# Altium PCB MiniRobot.PcbDoc
Units mm, origin at the board's own origin, x right, y up, seen from the top; angles counter-clockwise.
Board outline 90 x 85 mm, 2 copper layers (Top Layer, Bottom Layer); 52 components, 47 nets, 193 pads, 31 vias.
Unrouted connection lines stored in the file: 31.
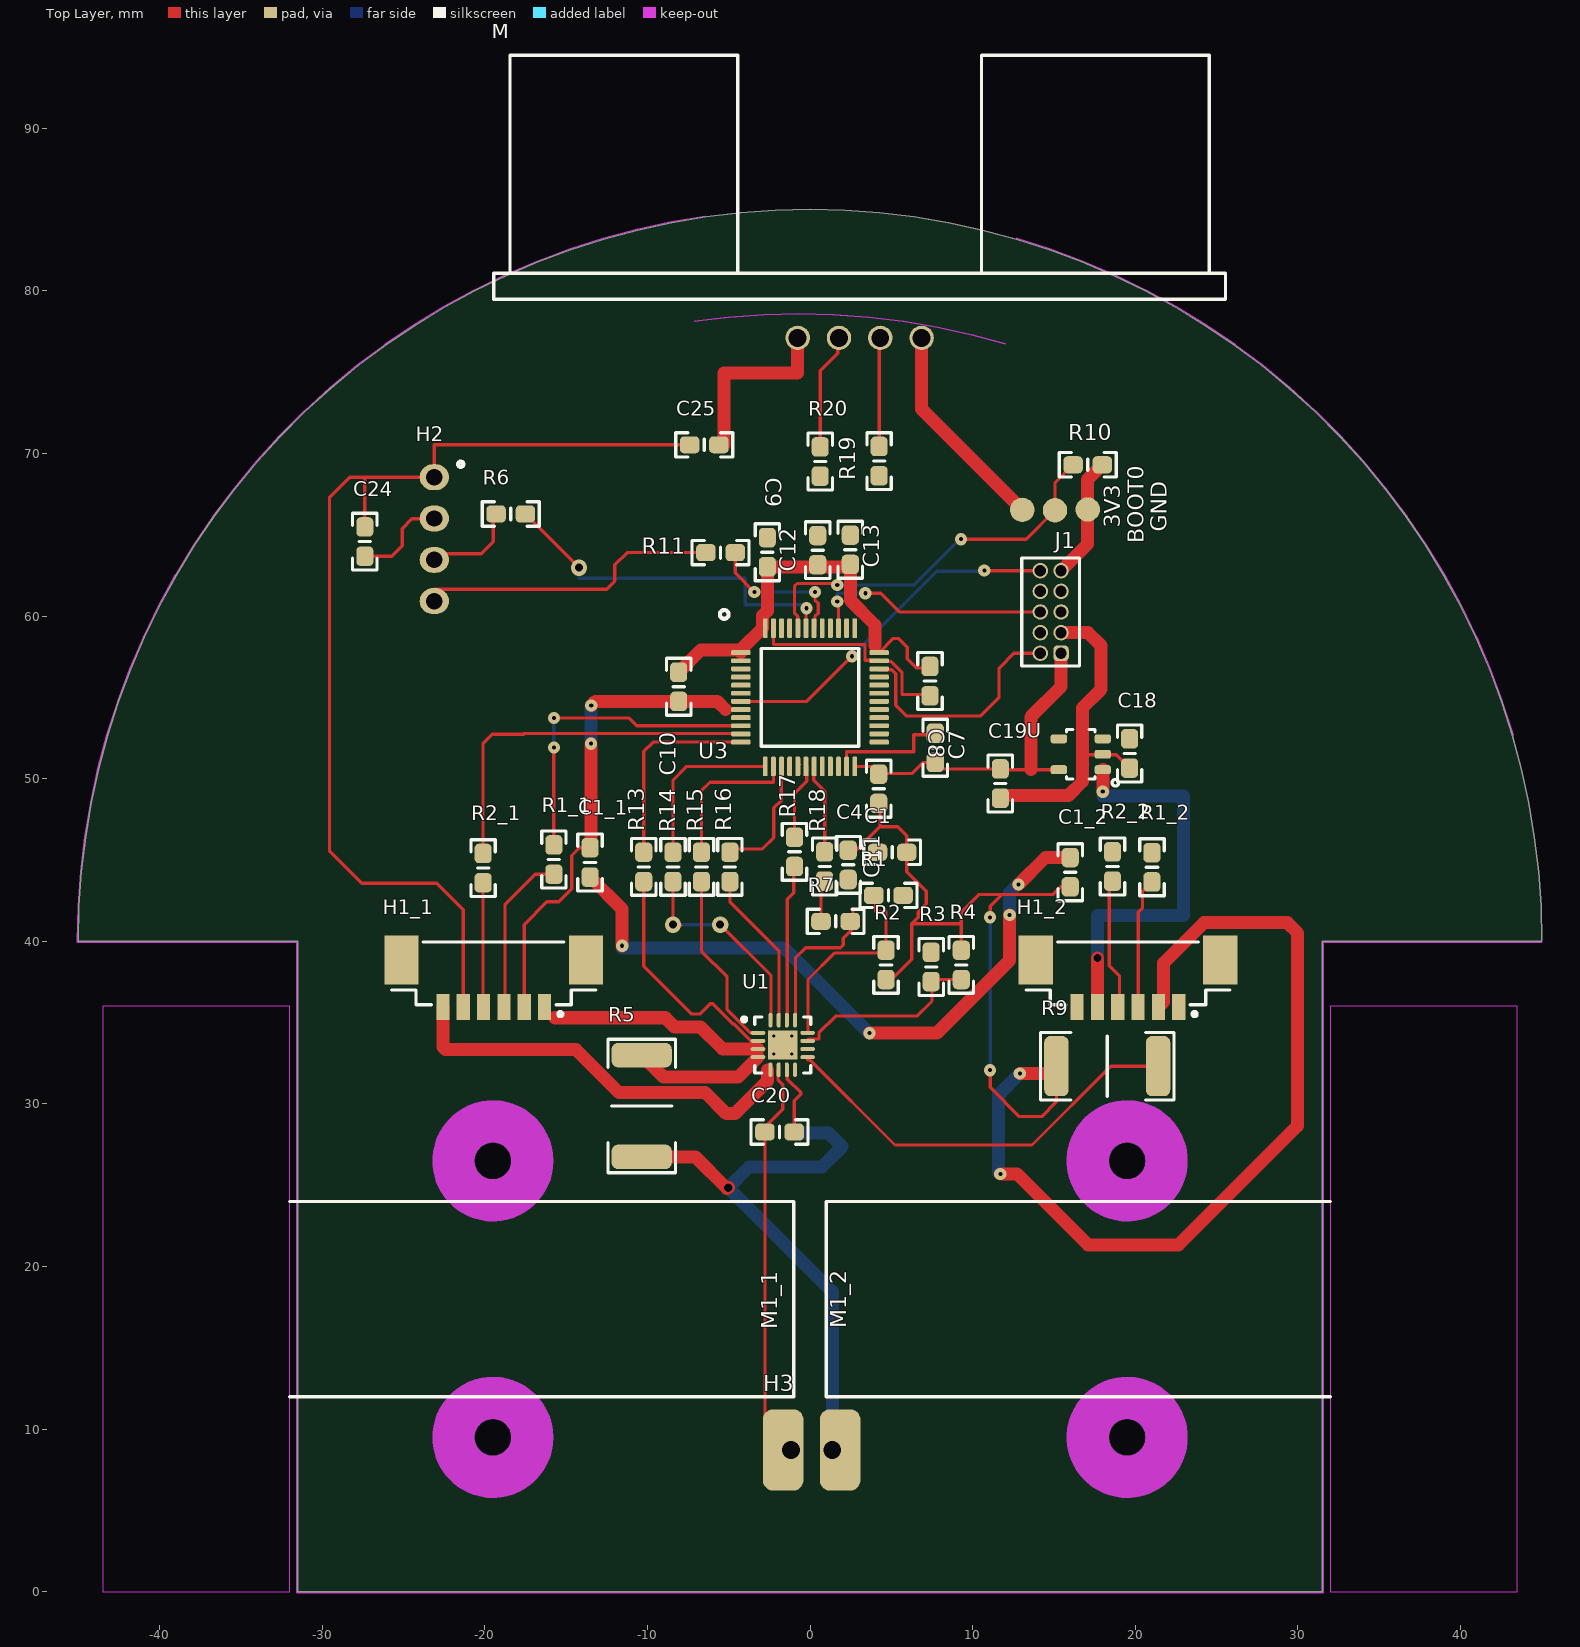
[diagram p0: Top Layer view]
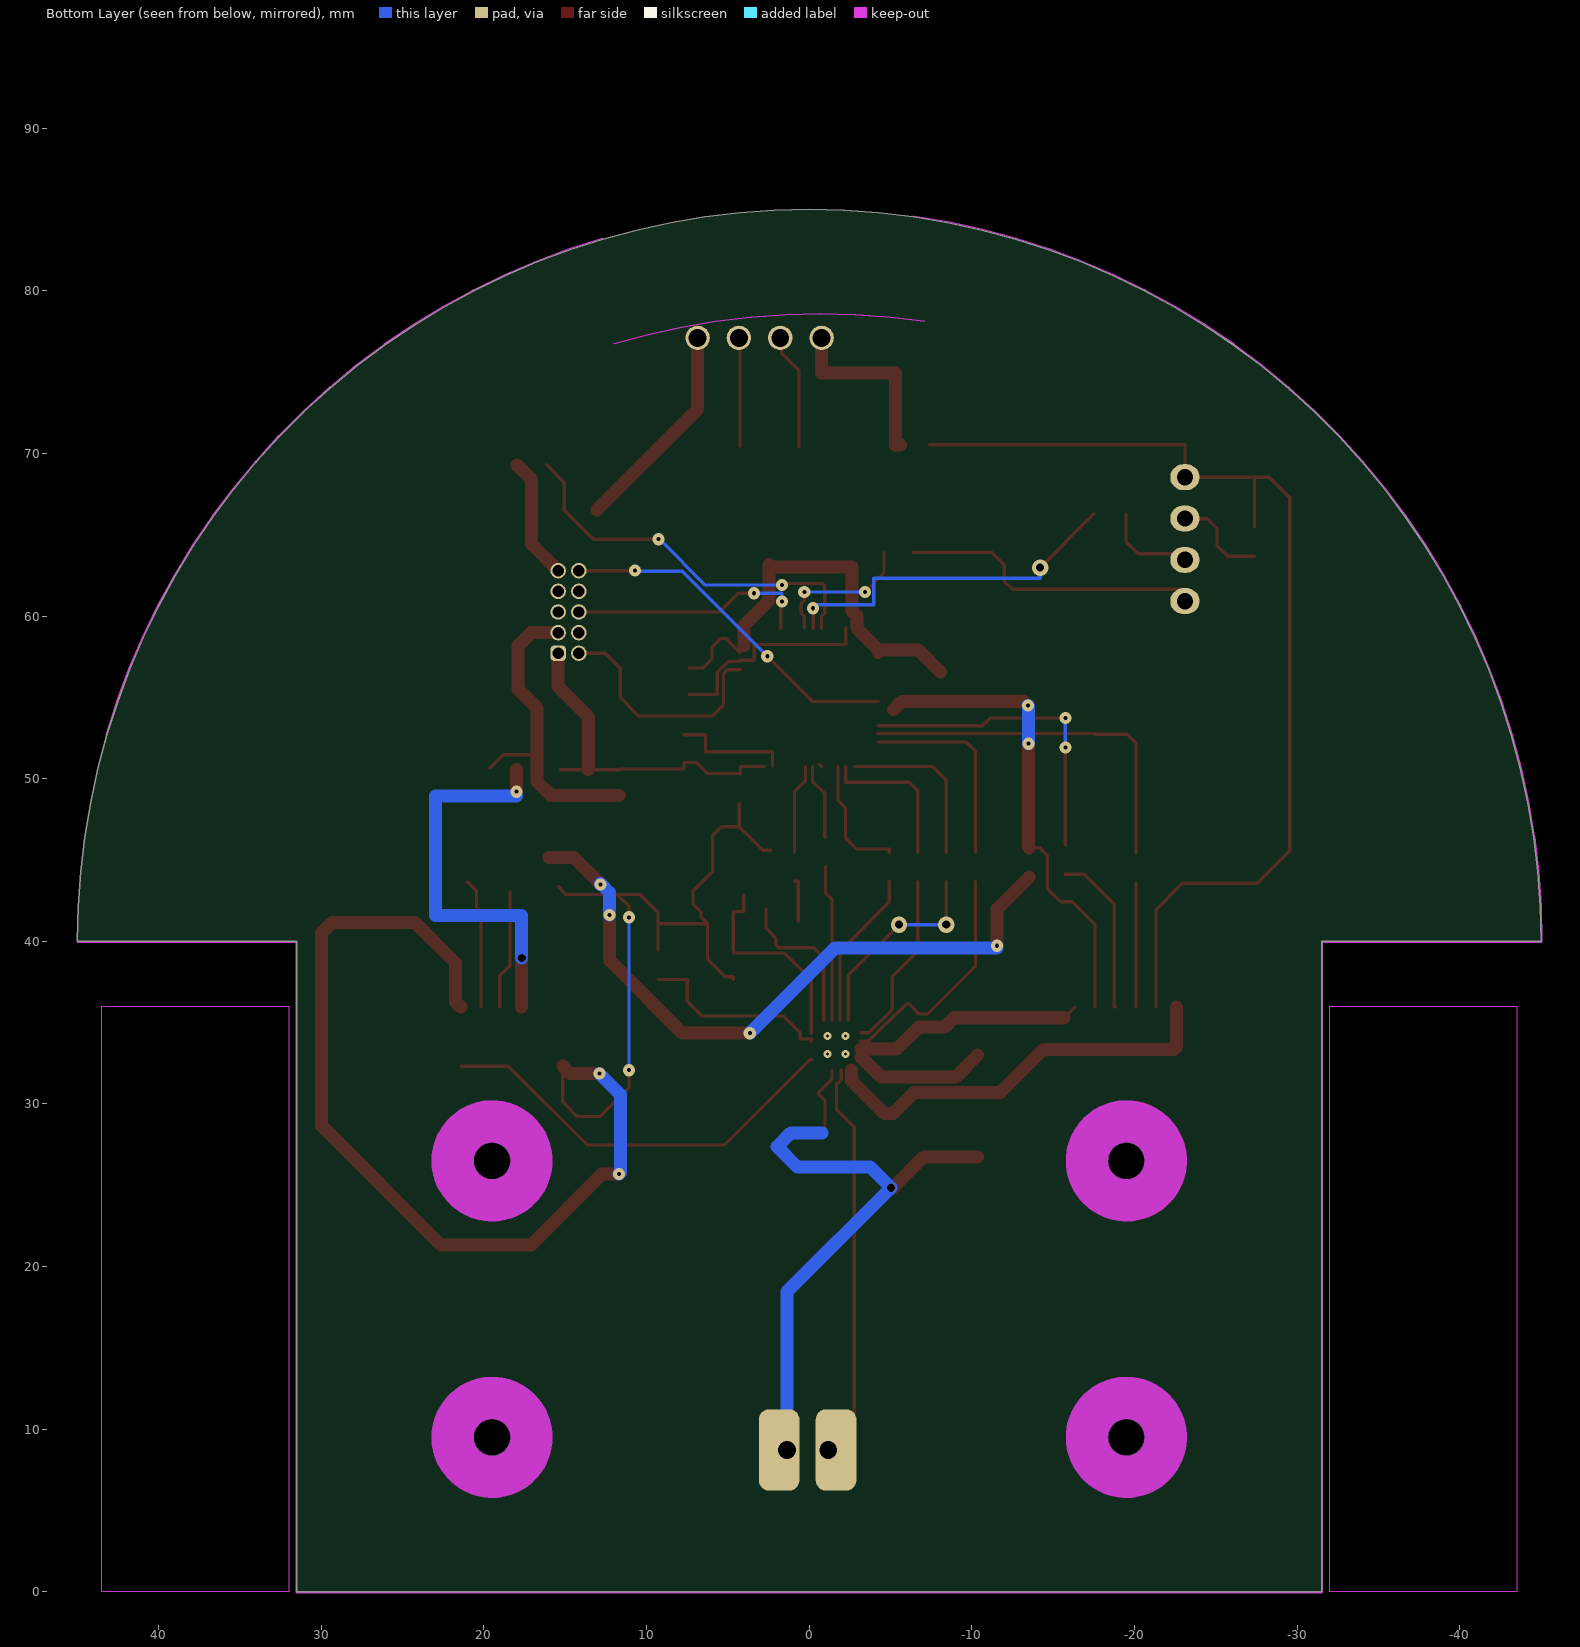
[diagram p1: Bottom Layer view, seen from below]

## Layer stack, top to bottom
Top Solder: solder mask 0.0102, Solder Resist, Dk 3.5
Top Layer: signal copper 0.0356
Dielectric 1: dielectric 0.32, FR-4, Dk 4.8
Bottom Layer: signal copper 0.0356
Bottom Solder: solder mask 0.0102, Solder Resist, Dk 3.5

## Board outline
45,40 44.949,42.141 44.796,44.278 44.542,46.404 44.187,48.516 43.732,50.609 43.177,52.678 42.525,54.718 41.777,56.725 40.933,58.694 39.998,60.62 38.971,62.5 37.856,64.329 36.656,66.103 35.372,67.817 34.009,69.469 32.568,71.054 31.054,72.568 29.469,74.009 27.817,75.372 26.103,76.656 24.329,77.856 22.5,78.971 20.62,79.998 18.694,80.933 16.725,81.777 14.718,82.525 12.678,83.177 10.609,83.732 8.516,84.187 6.404,84.542 4.278,84.796 2.141,84.949 0,85 -2.141,84.949 -4.278,84.796 -6.404,84.542 -8.516,84.187 -10.609,83.732 -12.678,83.177 -14.718,82.525 -16.725,81.777 -18.694,80.933 -20.62,79.998 -22.5,78.971 -24.329,77.856 -26.103,76.656 -27.817,75.372 -29.469,74.009 -31.054,72.568 -32.568,71.054 -34.009,69.469 -35.372,67.817 -36.656,66.103 -37.856,64.329 -38.971,62.5 -39.998,60.62 -40.933,58.694 -41.777,56.725 -42.525,54.718 -43.177,52.678 -43.732,50.609 -44.187,48.516 -44.542,46.404 -44.796,44.278 -44.949,42.141 -45,40 -31.5,40 -31.5,0 31.5,0 31.5,40

## Design rules (kind name [scope] priority, off if disabled: settings)
Clearance [All] p1: gap=0.125
ComponentClearance [All] p1 off: gap=0.254 collisioncheckmode=3 verticalgap=0.254 showdistances=FALSE
HoleSize [All] p1: absolutevalues=TRUE maxlimit=10 minlimit=0.19 maxpercent=80.000 minpercent=20.000
MinimumAnnularRing [All] p1: minimumring=0.076
MinimumSolderMaskSliver [All] p1: minsoldermaskwidth=0.154
PolygonConnect [All] p1: connectstyle=Relief reliefconductorwidth=0.254 reliefentries=4 polygonreliefangle="45 Angle" airgapwidth=0.254
RoutingVias [All] p1: holewidth=0.25 width=0.6 viastyle="Through Hole" minholewidth=0.2 minwidth=0.45 maxholewidth=1 maxwidth=2
SilkToSilkClearance [All] p1: silktosilkclearance=0.154
SilkToSolderMaskClearance [IsPad] p1: minsilkscreentomaskgap=0 clearancetoexposedcopper=TRUE
SolderMaskExpansion SolderMask_Via [IsVia] p1: expansion=-100
SolderMaskExpansion [All] p2: expansion=0.102
Width [All] p1: maxlimit=10 minlimit=0.075 preferedwidth=0.2 minimp=50.000000 maximp=50.000000 favimp=50.000000
24 further rules are at their usual default settings.

## Classes and differential pairs
channel class MR_Motor: LeftMotor RightMotor
component class U_MR_Power: C18 C19 H3 U
component class RightMotor: C1_2 H1_2 M1_2 R1_2 R2_2
component class LeftMotor: C1_1 H1_1 M1_1 R1_1 R2_1
component class U_MR_Mcu: 3V3 BOOT0 C7 C8 C9 C10 C11 C12 C13 GND J1 R10 R11 R13 R14 R15 R16 R17 R18 R19 U3
component class U_MR_Motor_Control: C1 C4 C20 R1 R2 R3 R4 R5 R7 R9 U1
component class U_MR_RangeSensor: C25 M R20
component class U_MR_UartConnector: C24 H2 R6

## Components (designator, comment, footprint, x,y, rotation, side; value= is the part's Value field where it differs from the comment)
3V3 "TestPoint" ROUND_TEST_POINT 13.05,66.525 r180 top
BOOT0 "TestPoint" ROUND_TEST_POINT 15.063,66.5 r270 top
C1 "CerCap" 0603_CAP_LD 5.05,45.475 r180 top
C1_1 "CerCap" 0603_CAP_LD -13.525,44.85 r270 top (schematic designator C1)
C1_2 "CerCap" 0603_CAP_LD 16,44.25 r90 top (schematic designator C1)
C4 "CerCap" 0603_CAP_LD 2.35,44.7 r270 top
C7 "CerCap" 0603_CAP_LD 7.7,51.9 r270 top
C8 "CerCap" 0603_CAP_LD 7.375,56 r90 top
C9 "CerCap" 0603_CAP_LD -2.625,63.925 r270 top
C10 "CerCap" 0603_CAP_LD -8.075,55.65 r90 top
C11 "CerCap" 0603_CAP_LD 4.225,49.375 r90 top
C12 "CerCap" 0603_CAP_LD 0.475,64.05 r270 top
C13 "CerCap" 0603_CAP_LD 2.475,64.075 r270 top
C18 "CerCap" 0603_CAP_LD 19.65,51.55 r90 top
C19 "CerCap" 0603_CAP_LD 11.7,49.7 r270 top
C20 "CerCap" 0603_CAP_LD -1.875,28.275 r180 top
C24 "CerCap" 0603_CAP_LD -27.375,64.575 r90 top
C25 "CerCap" 0603_CAP_LD -6.5,70.525 r180 top
GND "TestPoint" ROUND_TEST_POINT 17.075,66.55 r90 top
H1_1 "Header" HEADER_1X6_PICOBLADE_653106124022 -19.45,38.025 r180 top (schematic designator H1)
H1_2 "Header" HEADER_1X6_PICOBLADE_653106124022 19.55,38.025 r180 top (schematic designator H1)
H2 "Header" "HE14 1x4 Straight" -23.1,64.725 r270 top
H3 "CustomBatteryConnector" CUSTOMBATTERYCONNECTOR 0.1,8.725 r0 top
J1 "Debug" 62201021121 14.8,60.25 r90 top
M "Ultrasonic Range Sensor" HC-SR04 3.05,77.1 r0 top
M1_1 "MotorGroup" MOTORGROUP -1,18 r0 top locked (schematic designator M1)
M1_2 "MotorGroup" MOTORGROUP 1,18 r180 top locked (schematic designator M1)
R1 "Resistor" 0603_RES_LD 4.825,42.825 r180 top
R1_1 "Resistor" 0603_RES_LD -15.75,45.025 r270 top (schematic designator R1)
R1_2 "Resistor" 0603_RES_LD 21.025,44.55 r270 top (schematic designator R1)
R2 "Resistor" 0603_RES_LD 4.675,38.55 r90 top
R2_1 "Resistor" 0603_RES_LD -20.1,44.5 r270 top (schematic designator R2)
R2_2 "Resistor" 0603_RES_LD 18.6,44.6 r270 top (schematic designator R2)
R3 "Resistor" 0603_RES_LD 7.45,38.425 r90 top
R4 "Resistor" 0603_RES_LD 9.3,38.55 r270 top
R5 "Resistor" 2512_RES_LD -10.35,29.875 r270 top
R6 "Resistor" 0603_RES_LD -18.4,66.275 r180 top
R7 "Resistor" 0603_RES_LD 1.575,41.225 r0 top
R9 "Resistor" 2512_RES_LD 18.275,32.325 r180 top
R10 "Resistor" 0603_RES_LD 17.075,69.3 r180 top
R11 "Resistor" 0603_RES_LD -5.5,63.9 r0 top
R13 "Resistor" 0603_RES_LD -10.225,44.575 r90 top
R14 "Resistor" 0603_RES_LD -8.425,44.575 r90 top
R15 "Resistor" 0603_RES_LD -6.675,44.575 r90 top
R16 "Resistor" 0603_RES_LD -4.925,44.575 r90 top
R17 "Resistor" 0603_RES_LD -0.95,45.5 r90 top
R18 "Resistor" 0603_RES_LD 0.9,44.6 r90 top
R19 "Resistor" 0603_RES_LD 4.25,69.525 r270 top
R20 "Resistor" 0603_RES_LD 0.625,69.5 r90 top
U "Low noise, Low Iq LDO" LP5907 16.65,51.5 r180 top
U1 "Dual Brush Motor Driver" QFN-STSPIN240 -1.675,33.625 r0 top
U3 "Microcontroller" STM32_LQFP48 0,55 r0 top

## Footprints (in the part's own frame and the unit in brackets; to place one, negate y for a bottom-side part, rotate by r counter-clockwise, add the part's x,y. Pads: shape width x height; smd on the part's side, far side on the other; paste and mask are expansions set on the pad)
0603_CAP_LD [mm] "0603 Capacitor Low Density"
  rrect50% 1.2x1.05 smd: 1(-0.9,0) 2(0.9,0)
  silkscreen extent -1.75,-0.75 1.75,0.75
0603_RES_LD [mm] "0603 Resistor Low Density"
  rrect50% 1.2x1.05 smd: 1(-0.9,0) 2(0.9,0)
  silkscreen extent -1.75,-0.75 1.75,0.75
2512_RES_LD [mm] "2512 Low Density Resistor"
  rrect50% 1.5x3.7 smd: 1(-3.125,0) 2(3.125,0)
  silkscreen extent -4.1,-2.08 4.1,2.08
62201021121 [mm] "Pin Header, pitch 1.27 mm, THT, Vertical, dual row, 10p"
  rrect50% 0.95x0.95 hole 0.7: 1(-2.54,-0.635)
  round 0.95 hole 0.7: 2(-2.54,0.635) 3(-1.27,-0.635) 4(-1.27,0.635) 5(0,-0.635) 6(0,0.635) 7(1.27,-0.635) 8(1.27,0.635) 9(2.54,-0.635) 10(2.54,0.635)
  silkscreen extent -3.32,-1.78 3.32,1.78, body extent -3.17,-1.7 3.18,1.7, height 5.33
CUSTOMBATTERYCONNECTOR [mm] "CustomBatteryConnector"
  rrect50% 2.5x5 smd paste-100: +(-1.75,0) -(1.75,0)
  rrect50% 2.5x5 smd far side paste-100: +(-1.75,0) -(1.75,0)
  round 1.5 hole 1.1 unplated paste-100: +(-1.27,0) -(1.27,0)
HC-SR04 [mm] "HC-SR04"
  round 1.5 hole 1.1 unplated: 1(-3.81,0) 2(-1.27,0) 3(1.27,0) 4(3.81,0)
  silkscreen extent -22.5,2.37 22.5,17.38, body extent -22.72,-0.3 22.72,17.49, height 20
"HE14 1x4 Straight" [mm] "Connector HE14 Straight 1x4"
  oval 1.6x1.8 hole 1 mask+0.102: 1(-3.81,0) 2(-1.27,0) 3(1.27,0) 4(3.81,0)
  silkscreen extent -4.77,1.47 -4.45,1.78, body extent -5.08,-1.27 5.08,1.27, height 9.5
HEADER_1X6_PICOBLADE_653106124022 [mm] "1.25mm SMT Male Vertical Shrouded Header, 6p"
  rect 0.81x1.6 smd: 1(-3.125,2.07) 2(-1.875,2.07) 3(-0.625,2.07) 4(0.625,2.07) 5(1.875,2.07) 6(3.125,2.07)
  rect 2.1x3 smd: ""(-5.675,-0.83) ""(5.675,-0.83)
  silkscreen extent -6.27,-1.92 6.27,2.62
LP5907 [mm] "LP5907 SOT23"
  rrect50% 1x0.55 smd mask+0.102: 1(-1.35,0.95) 2(-1.35,0) 3(-1.35,-0.95) 4(1.35,-0.95) 5(1.35,0.95)
  silkscreen extent -2.33,-1.53 0.87,1.95
MOTORGROUP [mm]
  round 0 hole 2.2 unplated paste+0 mask+0: 21(-18.5,8.5) 22(-18.5,-8.5)
  Keep-Out Layer pour cut-out: -31,-18 -31,18 -42.5,18 -42.5,-18
  Keep-Out Layer circle w2.6: c-18.5,-8.5 r2.425
  Keep-Out Layer circle w2.6: c-18.5,8.5 r2.425
  silkscreen extent -31,-6 0,6
QFN-STSPIN240 [mm] "QFN, 16-Leads, Body 3,00x3,00mm, Pitch 0,50mm, Thermal Pad 1,80x1,80mm, IPC Low Density"
  oval 0.9x0.25 smd: 1(-1.525,0.75) 2(-1.525,0.25) 3(-1.525,-0.25) 4(-1.525,-0.75) 9(1.525,-0.75) 10(1.525,-0.25) 11(1.525,0.25) 12(1.525,0.75)
  oval 0.25x0.9 smd: 5(-0.75,-1.525) 6(-0.25,-1.525) 7(0.25,-1.525) 8(0.75,-1.525) 13(0.75,1.525) 14(0.25,1.525) 15(-0.25,1.525) 16(-0.75,1.525)
  rect 1.8x1.8 smd: 17(0,0)
  silkscreen extent -2.5,-1.72 1.73,1.72
ROUND_TEST_POINT [mm] "Small round test point"
  round 1.5 smd paste-100: 1(0,0)
STM32_LQFP48 [mm]
  rrect50% 1.2x0.3 smd: 1(-4.25,2.75) 2(-4.25,2.25) 3(-4.25,1.75) 4(-4.25,1.25) 5(-4.25,0.75) 6(-4.25,0.25) 7(-4.25,-0.25) 8(-4.25,-0.75) 9(-4.25,-1.25) 10(-4.25,-1.75) 11(-4.25,-2.25) 12(-4.25,-2.75) 25(4.25,-2.75) 26(4.25,-2.25) 27(4.25,-1.75) 28(4.25,-1.25) 29(4.25,-0.75) 30(4.25,-0.25) 31(4.25,0.25) 32(4.25,0.75) 33(4.25,1.25) 34(4.25,1.75) 35(4.25,2.25) 36(4.25,2.75)
  rrect50% 0.3x1.2 smd: 13(-2.75,-4.25) 14(-2.25,-4.25) 15(-1.75,-4.25) 16(-1.25,-4.25) 17(-0.75,-4.25) 18(-0.25,-4.25) 19(0.25,-4.25) 20(0.75,-4.25) 21(1.25,-4.25) 22(1.75,-4.25) 23(2.25,-4.25) 24(2.75,-4.25) 37(2.75,4.25) 38(2.25,4.25) 39(1.75,4.25) 40(1.25,4.25) 41(0.75,4.25) 42(0.25,4.25) 43(-0.25,4.25) 44(-0.75,4.25) 45(-1.25,4.25) 46(-1.75,4.25) 47(-2.25,4.25) 48(-2.75,4.25)
  silkscreen extent -5.54,-3 3,5.37

## Part data
C1 C1_1 C1_2 C4 C7 C8 C9 C10 C11 C12 C13 C18 C19 C20 C24 C25: "Ceramic Capacitor"
H1_1 H1_2: library part Header_6x1, "Header 6x1 Pins"
H2: library part Header_4x1, "Header 4x1 PIns"
H3: library part BatteryConnector, "Custom Battery Connector"
J1: library part Cortex_10x2, "Cortex 10 pins Debug Connector"
M: library part HC-SR04
M1_1 M1_2: library part Motor
U: library part LP5907, "LP5907 Low Noise Low Iq LDO"
U1: library part STSPIN240, "ST Dual Motor Driver"
U3: library part STM32F303CBT6, "STM32F303 Microcontroller"

## Via types
v1: diameter 0.75, hole 0.25, Top Layer to Bottom Layer, 22 vias
v2: diameter 0.5, hole 0.2, Top Layer to Bottom Layer, 4 vias
v3: diameter 1, hole 0.5, Top Layer to Bottom Layer, 3 vias
v4: diameter 0.5, hole 0.5, Top Layer to Bottom Layer, 2 vias

## Nets (pads, with @x,y where several pads share a name; then routed paths per layer and width w, separated by ;. In a path a pad name is that pad's centre, name@x,y a point inside that pad or via, vN(x,y) a via of type N, cw(c..) or ccw(c..) an arc to the next point about the centre after c; other vN are vias at no path point)
3V3: 3V3.1 C7.2 C8.2 C9.2 C10.2 C11.2 C12.2 C13.2 C19.1 J1.1 M.4 R3.2 U3.1 U3.9 U3.24 U3.36 U3.48 U.5 | length 60.8
  Top Layer w0.2: U3.1@-4.375,57.725 -4.375,57.8 U3.1@-4.25,57.8 ; U3.24 4.225,50.75 C11.2@4.225,50.325 ; C11.2 C11.2@4.225,50.325 ; U3.36 5.125,58.625 5.425,58.625 5.975,58.075 5.975,57.375 6.55,56.8 C8.2@7.375,56.8 ; 13.575,50.55 11.7,50.55 C19.1 7.7,50.6 C7.2 6.95,51 6.275,50.325 C11.2@4.225,50.325 ; 13.6,50.55 U.5
  Top Layer w0.8: C10.2 -6.7,57.925 -4.25,57.925 ; U3.1 -4.25,57.8 -4.25,57.925 ; 4,58.175 4,59.448 2.475,60.974 C13.2 2.325,63.025 C9.2 -2.625,60.324 -2.925,60.024 -2.925,59.25 -4.25,57.925 ; M.4 6.86,72.715 3V3.1 ; 13.6,50.55 13.575,50.55 13.575,53.8 15.435,55.66 J1.1
BOOT0: BOOT0.1 R10.2 U3.44 | length 24
  Top Layer w0.2: U3.44 -0.75,59.978 -0.95,60.178 -0.95,60.978 -0.95,61.85 -0.8,62 1.65,62 1.675,61.975 v1(1.675,61.903) ; v1(9.275,64.725) 13.287,64.725 BOOT0.1 15.062,68.2 16.15,69.288 R10.2@16.15,69.3
  Bottom Layer w0.2: v1(1.675,61.903) 6.378,61.903 9.2,64.725 v1(9.275,64.725)
GND: C1.1 C1_1.1 C1_2.1 C4.1 C7.1 C8.1 C9.1 C10.1 C11.1 C12.1 C13.1 C18.1 C19.2 C20.1 C24.1 C25.1 GND.1 H1_1.2 H1_2.2 H2.2 H3.- J1.3 J1.5 J1.9 M.1 R2.1 R4.1 R5.2 R9.2 R10.1 U1.7 U3.8 U3.23 U3.35 U3.47 U.2 | length 240.9
  Top Layer w0.2: C24.1 -25.725,63.675 -25.075,64.325 -25.075,65.375 -24.475,65.975 H2.2@-23.1,65.975 ; H1_1.2 -17.575,41.025 -16.175,42.425 -15.45,42.425 -14.65,43.225 -14.65,45.275 -14.175,45.75 C1_1.1 ; U3.47 -2.25,58.25 3.375,58.25 3.375,57.275 4.25,57.275 U3.35 4.25,57.2 4.99,57.2 5.65,56.54 5.65,55.175 C8.1@7.375,55.175 ; U1.7@-1.4,32.075 -1.4,31.525 -0.55,30.675 -0.55,30.625 -0.975,30.2 C20.1 ; U3.23 2.25,51.65 6.375,51.65 6.375,52.7 C7.1@7.7,52.7 ; C4.1 2.85,45.6 4.3,47.05 ; C11.1@4.3,48.475 4.3,47.05 ; R2.1 4.675,37.825 5.175,37.825 6.25,38.9 6.25,41.075 ; R4.1 9.3,41.075 ; v1(11.075,32.075) 11.075,31.025 12.875,29.225 14.25,29.225 15.15,30.125 R9.2 ; v1(11.075,41.475) 11.075,42.15 11.8,42.875 ; 15.435,43.375 14.935,42.875 11.8,42.875 ; J1.9 J1.9@15.435,63 ; 16.75,51.475 18.825,51.475 C18.1 ; 4.3,47.05 5.4,47.05 5.95,46.5 C1.1 5.95,44.275 7.15,43.075 7.15,42.3 6.65,41.8 6.65,41.475 6.25,41.075 ; 6.25,41.075 9.3,41.075 ; 9.3,41.075 9.3,41.8 10.375,42.875 11.8,42.875
  Top Layer w0.8: C1_1.1 -13.475,45.8 v1(-13.475,52.15) ; v1(-13.45,54.5) -13.2,54.75 C10.1 -5.699,54.75 -5.199,54.25 ; R5.2 -7.05,26.75 -5.1,24.8 -5.025,24.875 v4(-5.025,24.85) ; C25.1 -5.3,70.525 -5.3,74.95 -0.76,74.95 M.1 ; v1(11.7,25.7) 12.725,25.7 17.1,21.325 22.65,21.325 29.975,28.65 29.975,40.525 29.35,41.15 24.228,41.15 21.745,38.667 21.745,36.275 H1_2.2 ; C19.2@11.7,48.975 15.9,48.975 16.75,49.825 16.75,51.475 16.75,54.35 17.9,55.5 17.9,58.175 17.095,58.98 J1.3 ; v1(12.9,31.875) 14.7,31.875 R9.2 ; J1.9 17.075,64.43 GND.1 17.075,68.4 R10.1
  Bottom Layer w0.2: v1(11.075,32.075) v1(11.075,41.475)
  Bottom Layer w0.8: v1(-13.475,52.15) -13.475,54.475 v1(-13.45,54.5) ; -0.775,28.225 1.125,28.225 1.975,27.375 0.725,26.125 -3.75,26.125 v4(-5.025,24.85) 1.37,18.455 H3.-@1.37,8.725 ; v1(11.7,25.7) 11.6,25.8 11.6,30.575 v1(12.9,31.875)
NetC1_2: C1.2 R1.1
NetC4_2: C4.2 R7.2 U1.13 U3.20 | length 9.6
  Top Layer w0.2: U1.13@-0.9,35.125 -0.9,38.975 -0.275,39.6 1.875,39.6 2.05,39.775 2.05,40.2 2.65,40.8 2.65,41.975
NetH1_1_1: H1_1.1 U1.3 | length 14.2
  Top Layer w0.2: H1_1.1 -15.67,35.3
  Top Layer w0.8: -15.67,35.3 -8.9,35.3 -8.325,34.725 -6.725,34.725 -5.375,33.375 U1.3
NetH1_1_3: H1_1.3 R1_1.2 | length 10.2
  Top Layer w0.2: H1_1.3 -18.75,35.955 -18.75,42.275 -16.9,44.125 R1_1.2
NetH1_1_4: H1_1.4 R2_1.2 | length 7.7
  Top Layer w0.2: R2_1.2 -20.1,35.955 H1_1.4
NetH1_1_6: H1_1.6 U1.5 | length 25.6
  Top Layer w0.8: H1_1.6 -22.575,33.5 -22.425,33.35 -14.4,33.35 -11.75,30.7 -6.45,30.7 -5.15,29.4 -4.625,29.4 -2.6,31.425 -2.6,32.1
NetH1_2_1: H1_2.1 U1.10
NetH1_2_3: H1_2.3 R1_2.2 | length 8
  Top Layer w0.2: H1_2.3 20.175,41.8 20.45,42.075 20.45,43.075 R1_2.2
NetH1_2_4: H1_2.4 R2_2.2 | length 7.3
  Top Layer w0.2: 18.4,43.025 18.4,38.5 19.025,37.875 H1_2.4@19.025,35.955
NetH1_2_6: H1_2.6 U1.8
NetH2_3: H2.3 R6.2 | length 6
  Top Layer w0.2: H2.3 -23.1,63.825 -20.225,63.825 -19.475,64.575 R6.2@-19.475,66.275
NetH2_4: H2.4 R11.1 | length 19.1
  Top Layer w0.2: H2.4@-23.1,60.8 H2.4 -23.1,61.65 -12.5,61.65 -12,62.15 -12,63.15 -11.25,63.9 R11.1
NetM_2: M.2 R20.2 | length 7.1
  Top Layer w0.2: R20.2 0.625,75.075 1.7,76.15 M.2@1.7,77.1
NetM_3: M.3 R19.1 | length 6.7
  Top Layer w0.2: R19.1 4.25,77.1 M.3
NetR1_1_1: R1_1.1 U3.10 | length 19.5
  Top Layer w0.2: R1_1.1 v1(-15.75,51.925) v1@-15.725,51.925 ; v1(-15.75,53.725) -11.125,53.725 -10.65,53.25 U3.10
  Bottom Layer w0.2: v1(-15.75,51.925) v1(-15.75,53.725)
NetR1_2: R1.2 R2.2 U1.12 | length 12.8
  Top Layer w0.2: U1.12@-0.125,34.35 -0.125,37.65 1.5,39.275 R2.2@4.675,39.275 ; R1.2@4.025,42.825 4.025,41.825 4.675,41.825 R2.2
NetR1_2_1: R1_2.1 U3.16
NetR2_1_1: R2_1.1 U3.11 | length 23
  Top Layer w0.2: R2_1.1 -20.1,52.175 -19.55,52.725 -17.6,52.725 -17.6,52.775 U3.11@-4.2,52.775
NetR2_2_1: R2_2.1 U3.17 | length 0.2
  Top Layer w0.2: U3.17 U3.17@-0.625,50.875
NetR3_1: R3.1 R4.2 U1.11 | length 12.1
  Top Layer w0.2: U1.11@-0.125,33.85 -0.125,34 0.55,34 0.55,34.375 1.575,35.4 6.575,35.4 7.5,36.325 R3.1@7.5,37.525 ; R3.1 7.45,37.65 R4.2
NetR5_1: R5.1 U1.4 | length 8.2
  Top Layer w0.8: R5.1 -9,31.65 -4.425,31.65 U1.4
NetR6_1: R6.1 U3.43 | length 22.4
  Top Layer w0.2: R6.1 v3(-14.2,62.975) ; U3.43 -0.25,60.478 v1(-0.225,60.478)
  Bottom Layer w0.2: v3(-14.2,62.975) -14.2,62.325 -3.975,62.325 -3.975,60.7 -0.225,60.7 v1(-0.225,60.478)
NetR7_1: R7.1 R18.1 | length 2.7
  Top Layer w0.2: R7.1 0.675,43.7 R18.1
NetR9_1: R9.1 U1.9 | length 25.7
  Top Layer w0.2: -0.15,32.725 -0.025,32.725 5.225,27.475 13.65,27.475 18.5,32.325 R9.1
NetR11_2: R11.2 U3.42 | length 9
  Top Layer w0.2: R11.2 -4.6,62.65 v1(-3.425,61.475) ; U3.42@0.3,59.3 0.3,59.978 0.5,60.178 0.5,60.778 0.3,60.978 v1(0.3,61.475)
  Bottom Layer w0.2: v1(-3.425,61.475) v1(0.3,61.475)
NetR13_1: R13.1 U1.2 | length 14.7
  Top Layer w0.2: R13.1 -10.225,38.475 -7.275,35.525 -6.775,35.525 -6.137,36.163 -5.987,36.163 -4.75,34.925 -4.7,34.925 -3.625,33.85 U1.2@-3.175,33.85
NetR13_2: R13.2 U3.12 | length 12.4
  Top Layer w0.2: R13.2 -10.225,51.675 -9.65,52.25 U3.12
NetR14_1: R14.1 U1.16 | length 13
  Top Layer w0.2: R14.1 -8.425,41.45 v3@-7.95,40.975 ; v3(-5.525,41.025) -2.4,37.9 U1.16@-2.4,35.125
  Bottom Layer w0.2: v3(-8.425,41.025) v3(-5.525,41.025)
NetR14_2: R14.2 U3.13 | length 10.5
  Top Layer w0.2: R14.2 -8.425,49.9 -7.575,50.75 U3.13
NetR15_1: R15.1 U1.1 | length 11
  Top Layer w0.2: R15.1 -6.675,39.4 -5.1,37.825 -5.1,35.8 -3.675,34.375 U1.1
NetR15_2: R15.2 U3.14 | length 9.4
  Top Layer w0.2: R15.2 -6.675,49.25 -6.15,49.775 -2.25,49.775 U3.14
NetR16_1: R16.1 U1.15 | length 9.8
  Top Layer w0.2: R16.1 -4.925,42.425 -1.9,39.4 U1.15@-1.9,35.125
NetR16_2: R16.2 U3.15 | length 7.8
  Top Layer w0.2: R16.2 -4.925,45.675 -2.925,45.675 -2.225,46.375 -2.225,48.2 -1.775,48.65 U3.15@-1.775,50.75
NetR17_1: R17.1 U1.14 | length 9.6
  Top Layer w0.2: U1.14@-1.4,35.125 -1.4,42.575 -1,42.975 R17.1@-1,44.6
NetR17_2: R17.2 U3.18 | length 4.7
  Top Layer w0.2: R17.2 -0.95,49.1 -0.2,49.85 U3.18@-0.2,50.75
NetR18_2: R18.2 U3.19 | length 5.5
  Top Layer w0.2: U3.19@0.225,50.75 0.225,49.9 0.9,49.225 R18.2
NetR19_2: R19.2 U3.46
NetR20_1: R20.1 U3.45
nRST: J1.10 U3.7 | length 21.7
  Top Layer w0.2: U3.7 -0.2,54.75 v1(2.575,57.525) ; v1(10.715,62.79) J1.10
  Bottom Layer w0.2: v1(2.575,57.525) 7.8,62.75 10.675,62.75 v1(10.715,62.79)
SWCLK: J1.4 U3.37
SWDIO: J1.2 U3.34 | length 14.9
  Top Layer w0.2: U3.34 4.25,56.7 5.031,56.7 5.275,56.456 5.275,54.525 5.95,53.85 10.475,53.85 11.625,55 11.625,56.8 12.535,57.71 J1.2
SWO: J1.6 U3.39 | length 15.1
  Top Layer w0.2: v1(1.675,60.9) 1.75,60.825 U3.39 ; v1(3.4,61.4) 4.35,61.4 5.5,60.25 J1.6
  Bottom Layer w0.2: v1(1.675,60.9) 1.675,61.4 v1(3.4,61.4)
VBATT: C18.2 C20.2 C24.2 C25.2 H1_1.5 H1_2.5 H2.1 H3.+ U1.6 U.1 U.3 | length 115.1
  Top Layer w0.2: C24.2 -27.375,68.535 ; H1_1.5 -21.325,41.95 -22.95,43.575 -27.55,43.575 -29.55,45.575 -29.55,67.275 -28.29,68.535 -27.375,68.535 ; C25.2 -23.1,70.525 H2.1 -27.375,68.535 ; U1.6@-1.975,32.075 -1.975,31.475 -1.675,31.175 -1.675,29.675 -2.775,28.575 C20.2 -2.775,8.725 H3.+@-1.65,8.725
  Top Layer w0.8: H1_2.5 v4(17.675,38.975) ; v1(18,49.2) U.1
  Bottom Layer w0.2: v1@18,48.925 v1(18,49.2)
  Bottom Layer w0.8: v4(17.675,38.975) 17.675,41.575 22.975,41.575 22.975,48.925 v1@18,48.925
VCC: C1_1.2 C1_2.2 | length 41.9
  Top Layer w0.8: C1_1.2 -11.55,41.975 v1(-11.55,39.725) ; v1(3.65,34.35) 7.8,34.35 12.275,38.825 v1(12.275,41.625) ; v1(12.825,43.5) 14.475,45.15 C1_2.2
  Bottom Layer w0.8: v1(-11.55,39.725) -11.55,39.6 -1.6,39.6 v1(3.65,34.35) ; v1(12.275,41.625) 12.275,43 12.825,43.55 v1(12.825,43.5)
pads on no net: H1_1. H1_2. J1.7 J1.8 M1_1.21 M1_1.22 M1_2.21 M1_2.22 U1.17 U3.2 U3.3 U3.4 U3.5 U3.6 U3.21 U3.22 U3.25 U3.26 U3.27 U3.28 U3.29 U3.30 U3.31 U3.32 U3.33 U3.38 U3.40 U3.41 U.4
copper on no net:
  other v2: -2.225,33.075 -1.125,33.075 -2.225,34.175 -1.125,34.175

## Keep-outs
Keep-Out Layer:
  lines w0.1: -6.413,84.591 -8.524,84.236 ; 12.693,83.225 14.733,82.573 ; 43.225,52.693 42.573,54.733 ; 45,39.95 31.55,39.95 31.55,0 ; -45.05,40.001 ccw(c-45,40) -45,39.95 ; -45.05,40.002 ccw(c-45,40) -45,39.95 ; -45.05,40.002 -44.999,42.142 ; -45.05,40.001 -45.05,40.002 ; -45,39.95 -31.55,39.95 -31.55,0 ; -44.999,42.142 cw(c-44.949,42.141) -44.999,42.145 ; -44.999,42.142 cw(c-44.949,42.141) -44.999,42.145 ; -44.999,42.142 -44.999,42.142 ; -44.999,42.145 -44.846,44.281 ; -44.846,44.281 cw(c-44.796,44.278) -44.846,44.283 ; -44.846,44.281 cw(c-44.796,44.278) -44.846,44.283 ; -44.846,44.283 -44.592,46.41 ; -44.592,46.41 cw(c-44.542,46.404) -44.591,46.413 ; -44.592,46.41 cw(c-44.542,46.404) -44.591,46.412 ; -44.591,46.413 -44.236,48.524 ; -44.591,46.412 -44.591,46.413 ; -44.236,48.525 cw(c-44.187,48.516) -44.236,48.527 ; -44.236,48.524 cw(c-44.187,48.516) -44.236,48.527 ; -44.236,48.524 -44.236,48.525 ; -44.236,48.527 ccw(c-44.187,48.516) -44.236,48.527 ; -44.236,48.527 -43.78,50.62 ; -44.236,48.527 -44.236,48.527 ; -44.236,48.527 -44.236,48.527 ; -43.78,50.62 cw(c-43.732,50.609) -43.78,50.622 ; -43.78,50.62 ccw(c-43.732,50.609) -43.78,50.62 ; -43.78,50.62 cw(c-43.732,50.609) -43.78,50.622 ; -43.78,50.62 -43.78,50.62 ; -43.78,50.62 -43.78,50.62 ; -43.78,50.622 ccw(c-43.732,50.609) -43.78,50.622 ; -43.78,50.622 -43.226,52.691 ; -43.78,50.622 -43.78,50.622 ; -43.78,50.622 -43.78,50.622 ; -43.226,52.691 cw(c-43.177,52.678) -43.225,52.693 ; -43.226,52.691 ccw(c-43.177,52.678) -43.226,52.691 ; -43.226,52.691 cw(c-43.177,52.678) -43.225,52.693 ; -43.226,52.691 -43.225,52.691 ; -43.226,52.691 -43.226,52.691 ; -43.225,52.693 -42.573,54.733 ; -42.573,54.733 cw(c-42.525,54.718) -42.572,54.735 ; -42.573,54.733 cw(c-42.525,54.718) -42.572,54.736 ; -42.572,54.736 ccw(c-42.525,54.718) -42.572,54.735 ; -42.572,54.736 -41.824,56.742 ; -42.572,54.736 -42.572,54.736 ; -42.572,54.735 -42.572,54.736 ; -41.823,56.742 cw(c-41.777,56.725) -41.823,56.744 ; -41.823,56.742 ccw(c-41.777,56.725) -41.823,56.742 ; -41.823,56.742 cw(c-41.777,56.725) -41.823,56.744 ; -41.823,56.742 -41.823,56.742 ; -41.824,56.742 -41.823,56.742 ; -41.823,56.744 -40.979,58.713 ; -40.979,58.713 cw(c-40.933,58.694) -40.979,58.715 ; -40.979,58.713 cw(c-40.933,58.694) -40.978,58.716 ; -40.979,58.715 cw(c-40.933,58.694) -40.978,58.716 ; -40.979,58.715 -40.978,58.716 ; -40.978,58.716 -40.043,60.642 ; -40.978,58.716 -40.978,58.716 ; -40.043,60.642 cw(c-39.998,60.62) -40.042,60.644 ; -40.043,60.642 cw(c-39.998,60.62) -40.043,60.642 ; -40.043,60.642 -40.043,60.642 ; -40.043,60.642 -40.043,60.642 ; -40.043,60.642 cw(c-39.998,60.62) -40.042,60.644 ; -40.041,60.644 -39.015,62.524 ; -39.015,62.524 cw(c-38.971,62.5) -39.014,62.526 ; -39.015,62.524 cw(c-38.971,62.5) -39.014,62.526 ; -39.014,62.526 -37.899,64.355 ; -37.899,64.355 cw(c-37.856,64.329) -37.898,64.357 ; -37.899,64.355 cw(c-37.856,64.329) -37.898,64.357 ; -37.898,64.357 -36.698,66.13 ; -37.898,64.357 -37.898,64.357 ; -36.697,66.131 cw(c-36.656,66.103) -36.696,66.133 ; -36.698,66.13 cw(c-36.656,66.103) -36.696,66.133 ; -36.698,66.13 -36.697,66.131 ; -36.696,66.133 -35.412,67.847 ; -35.412,67.847 cw(c-35.372,67.817) -35.411,67.849 ; -35.412,67.847 cw(c-35.372,67.817) -35.411,67.849 ; -35.411,67.849 -34.047,69.501 ; -34.047,69.501 cw(c-34.009,69.469) -34.046,69.502 ; -34.047,69.501 cw(c-34.009,69.469) -34.046,69.502 ; -34.046,69.503 ccw(c-34.009,69.469) -34.046,69.502 ; -34.046,69.503 -32.605,71.087 ; -34.046,69.502 -34.046,69.503 ; -34.046,69.502 -34.046,69.502 ; -32.605,71.087 cw(c-32.568,71.054) -32.603,71.089 ; -32.605,71.087 ccw(c-32.568,71.054) -32.605,71.087 ; -32.605,71.087 cw(c-32.568,71.054) -32.603,71.089 ; -32.605,71.087 -32.605,71.087 ; -32.605,71.087 -32.605,71.087 ; -32.603,71.089 -31.089,72.603 ; -31.55,0 ccw(c-31.5,0) -31.5,-0.05 ; -31.55,0 ccw(c-31.5,0) -31.5,-0.05 ; -31.5,-0.05 31.5,-0.05 ; -31.089,72.603 cw(c-31.054,72.568) -31.087,72.605 ; -31.089,72.603 cw(c-31.054,72.568) -31.087,72.605 ; -31.087,72.605 ccw(c-31.054,72.568) -31.087,72.605 ; -31.087,72.605 -29.503,74.046 ; -31.087,72.605 -31.087,72.605 ; -31.087,72.605 -31.087,72.605 ; -29.503,74.046 cw(c-29.469,74.009) -29.502,74.046 ; -29.503,74.046 -29.502,74.046 ; -29.502,74.046 cw(c-29.469,74.009) -29.501,74.047 ; -29.502,74.046 cw(c-29.469,74.009) -29.501,74.047 ; -29.502,74.046 -29.502,74.046 ; -29.501,74.047 -27.849,75.411 ; -27.849,75.411 cw(c-27.817,75.372) -27.847,75.412 ; -27.849,75.411 cw(c-27.817,75.372) -27.847,75.412 ; -27.847,75.412 -26.133,76.696 ; -26.133,76.696 cw(c-26.103,76.656) -26.13,76.698 ; -26.133,76.696 cw(c-26.103,76.656) -26.131,76.697 -26.13,76.698 ; -26.13,76.698 -24.357,77.898 ; -24.357,77.898 cw(c-24.329,77.856) -24.355,77.899 ; -24.357,77.898 cw(c-24.329,77.856) -24.355,77.899 ; -24.357,77.898 -24.357,77.898 ; -24.355,77.899 -22.526,79.014 ; -22.526,79.014 cw(c-22.5,78.971) -22.524,79.015 ; -22.526,79.014 cw(c-22.5,78.971) -22.524,79.015 ; -22.524,79.015 -20.644,80.042 ; -20.644,80.041 cw(c-20.62,79.998) -20.642,80.042 ; -20.644,80.041 cw(c-20.62,79.998) -20.642,80.043 ; -20.642,80.042 cw(c-20.62,79.998) -20.642,80.043 ; -20.642,80.043 -20.642,80.043 ; -20.642,80.042 -20.642,80.043 ; -20.642,80.043 -18.716,80.978 ; -18.716,80.978 cw(c-18.694,80.933) -18.713,80.979 ; -18.715,80.979 ccw(c-18.694,80.933) -18.716,80.978 ; -18.715,80.979 cw(c-18.694,80.933) -18.713,80.979 ; -18.716,80.978 -18.715,80.979 ; -18.716,80.978 -18.716,80.978 ; -18.713,80.979 -16.745,81.823 ; -16.745,81.823 cw(c-16.725,81.777) -16.742,81.823 ; -16.745,81.823 cw(c-16.725,81.777) -16.742,81.823 ; -16.742,81.823 cw(c-16.725,81.777) -16.742,81.823 ; -16.742,81.823 -16.742,81.823 ; -16.742,81.823 -16.742,81.823 ; -16.742,81.823 -14.736,82.572 ; -14.736,82.572 cw(c-14.718,82.525) -14.735,82.572 ; -14.736,82.572 -14.736,82.572 ; -14.736,82.572 cw(c-14.718,82.525) -14.733,82.573 ; -14.735,82.572 cw(c-14.718,82.525) -14.733,82.573 ; -14.736,82.572 -14.735,82.572 ; -14.733,82.573 -12.693,83.225 ; -12.693,83.225 cw(c-12.678,83.177) -12.691,83.225 ; -12.693,83.225 cw(c-12.678,83.177) -12.691,83.226 ; -12.691,83.225 cw(c-12.678,83.177) -12.691,83.226 ; -12.691,83.225 -12.691,83.225 ; -12.691,83.226 -10.622,83.78 ; -12.691,83.225 -12.691,83.226 ; -10.622,83.78 cw(c-10.609,83.732) -10.622,83.78 ; -10.622,83.78 -10.622,83.78 ; -10.622,83.78 cw(c-10.609,83.732) -10.62,83.78 ; -10.622,83.78 cw(c-10.609,83.732) -10.62,83.78 ; -10.622,83.78 -10.622,83.78 ; -10.62,83.78 -8.527,84.236 ; -8.527,84.236 cw(c-8.516,84.187) -8.524,84.236 ; -8.527,84.236 cw(c-8.516,84.187) -8.525,84.236 -8.524,84.236 ; -7.112,78.116 cw(c-7.104,78.067) -7.11,78.117 ; -7.113,78.116 cw(c-7.104,78.067) -7.11,78.117 ; -7.113,78.116 -7.112,78.116 ; -7.11,78.117 -4.983,78.371 ; -4.983,78.371 cw(c-4.978,78.321) -4.981,78.371 ; -4.983,78.371 cw(c-4.978,78.321) -4.981,78.371 ; -4.981,78.371 -2.845,78.524 ; -2.845,78.524 cw(c-2.841,78.474) -2.842,78.524 ; -2.845,78.524 cw(c-2.841,78.474) -2.842,78.524 -2.842,78.524 ; -2.842,78.524 -0.702,78.575 ; -0.701,78.575 cw(c-0.7,78.525) -0.698,78.575 ; -0.702,78.575 cw(c-0.7,78.525) -0.699,78.575 ; -0.702,78.575 -0.701,78.575 ; -0.698,78.575 1.442,78.524 ; -0.699,78.575 -0.698,78.575 ; 1.442,78.524 cw(c1.441,78.474) 1.445,78.524 ; 1.442,78.524 cw(c1.441,78.474) 1.445,78.524 ; 1.442,78.524 1.442,78.524 ; 1.445,78.524 3.581,78.371 ; 3.581,78.371 cw(c3.578,78.321) 3.583,78.371 ; 3.581,78.371 cw(c3.578,78.321) 3.583,78.371 ; 3.583,78.371 5.71,78.117 ; 5.71,78.117 cw(c5.704,78.067) 5.713,78.116 ; 5.71,78.117 cw(c5.704,78.067) 5.712,78.116 5.713,78.116 ; 5.713,78.116 7.824,77.761 ; 7.824,77.761 cw(c7.816,77.712) 7.827,77.761 ; 7.824,77.761 7.825,77.761 cw(c7.816,77.712) 7.827,77.761 ; 7.827,77.761 ccw(c7.816,77.712) 7.827,77.761 ; 7.827,77.761 9.92,77.305 ; 7.827,77.761 7.827,77.761 ; 7.827,77.761 7.827,77.761 ; 9.92,77.305 cw(c9.909,77.257) 9.922,77.305 ; 9.92,77.305 ccw(c9.909,77.257) 9.92,77.305 ; 9.92,77.305 cw(c9.909,77.257) 9.922,77.305 ; 9.92,77.305 9.92,77.305 ; 9.92,77.305 9.92,77.305 ; 9.922,77.305 ccw(c9.909,77.257) 9.922,77.305 ; 9.922,77.305 11.991,76.751 ; 9.922,77.305 9.922,77.305 ; 9.922,77.305 9.922,77.305 ; 11.991,76.751 cw(c11.978,76.702) 11.993,76.75 ccw(c11.978,76.702) 11.991,76.75 ; 11.991,76.75 ccw(c11.978,76.702) 11.991,76.751 ; 11.991,76.751 11.991,76.75 ; 11.991,76.751 11.991,76.751 ; 14.733,82.573 cw(c14.718,82.525) 14.735,82.572 ; 14.733,82.573 cw(c14.718,82.525) 14.736,82.572 ; 14.736,82.572 ccw(c14.718,82.525) 14.735,82.572 ; 14.736,82.572 16.742,81.823 ; 14.736,82.572 14.736,82.572 ; 14.735,82.572 14.736,82.572 ; 16.742,81.823 cw(c16.725,81.777) 16.744,81.823 ; 16.742,81.823 ccw(c16.725,81.777) 16.742,81.823 ; 16.742,81.823 cw(c16.725,81.777) 16.744,81.823 ; 16.742,81.823 16.742,81.823 ; 16.742,81.823 16.742,81.823 ; 16.744,81.823 18.713,80.979 ; 18.713,80.979 cw(c18.694,80.933) 18.715,80.979 ; 18.713,80.979 cw(c18.694,80.933) 18.716,80.978 ; 18.716,80.978 ccw(c18.694,80.933) 18.715,80.979 ; 18.716,80.978 20.642,80.043 ; 18.716,80.978 18.716,80.978 ; 18.715,80.979 18.716,80.978 ; 20.642,80.042 ccw(c20.62,79.998) 20.642,80.043 ; 20.642,80.042 cw(c20.62,79.998) 20.644,80.042 ; 20.642,80.043 20.642,80.043 ; 20.642,80.043 cw(c20.62,79.998) 20.644,80.042 ; 20.642,80.043 20.642,80.043 ; 20.644,80.042 22.524,79.015 ; 22.524,79.015 cw(c22.5,78.971) 22.526,79.014 ; 22.524,79.015 cw(c22.5,78.971) 22.526,79.014 ; 22.526,79.014 24.355,77.899 ; 24.355,77.899 cw(c24.329,77.856) 24.357,77.898 ; 24.355,77.899 cw(c24.329,77.856) 24.357,77.898 ; 24.357,77.898 26.13,76.698 ; 24.357,77.898 24.357,77.898 ; 26.13,76.698 cw(c26.103,76.656) 26.133,76.696 ; 26.13,76.698 26.131,76.697 cw(c26.103,76.656) 26.133,76.696 ; 26.133,76.696 27.847,75.412 ; 27.847,75.412 cw(c27.817,75.372) 27.849,75.411 ; 27.847,75.412 cw(c27.817,75.372) 27.849,75.411 ; 27.849,75.411 29.501,74.047 ; 29.501,74.047 cw(c29.469,74.009) 29.502,74.046 ; 29.501,74.047 cw(c29.469,74.009) 29.502,74.046 ; 29.502,74.046 cw(c29.469,74.009) 29.503,74.046 ; 29.502,74.046 29.502,74.046 ; 29.503,74.046 31.087,72.605 ; 29.503,74.046 29.502,74.046 ; 31.087,72.605 cw(c31.054,72.568) 31.087,72.605 ; 31.087,72.605 31.087,72.605 ; 31.087,72.605 cw(c31.054,72.568) 31.089,72.603 ; 31.087,72.605 cw(c31.054,72.568) 31.089,72.603 ; 31.087,72.605 31.087,72.605 ; 31.089,72.603 32.603,71.089 ; 31.5,-0.05 ccw(c31.5,0) 31.55,0 ; 31.5,-0.05 ccw(c31.5,0) 31.55,0 ; 32.603,71.089 cw(c32.568,71.054) 32.605,71.087 ; 32.603,71.089 cw(c32.568,71.054) 32.605,71.087 ; 32.605,71.087 ccw(c32.568,71.054) 32.605,71.087 ; 32.605,71.087 32.605,71.087 ; 32.605,71.087 32.605,71.087 ; 32.605,71.087 34.046,69.503 ; 34.046,69.502 cw(c34.009,69.469) 34.047,69.501 ; 34.046,69.502 ccw(c34.009,69.469) 34.046,69.503 ; 34.046,69.502 cw(c34.009,69.469) 34.047,69.501 ; 34.046,69.503 34.046,69.502 ; 34.046,69.502 34.046,69.502 ; 34.047,69.501 35.411,67.849 ; 35.411,67.849 cw(c35.372,67.817) 35.412,67.847 ; 35.411,67.849 cw(c35.372,67.817) 35.412,67.847 ; 35.412,67.847 36.696,66.133 ; 36.696,66.133 cw(c36.656,66.103) 36.698,66.13 ; 36.696,66.133 cw(c36.656,66.103) 36.697,66.131 ; 36.697,66.131 36.698,66.13 ; 36.698,66.13 37.898,64.357 ; 37.898,64.357 cw(c37.856,64.329) 37.899,64.355 ; 37.898,64.357 cw(c37.856,64.329) 37.899,64.355 ; 37.898,64.357 37.898,64.357 ; 37.899,64.355 39.014,62.526 ; 39.014,62.526 cw(c38.971,62.5) 39.015,62.524 ; 39.014,62.526 cw(c38.971,62.5) 39.015,62.524 ; 39.015,62.524 40.042,60.644 ; 40.041,60.644 cw(c39.998,60.62) 40.042,60.642 ; 40.041,60.644 cw(c39.998,60.62) 40.043,60.642 ; 40.043,60.642 ccw(c39.998,60.62) 40.042,60.642 ; 40.043,60.642 40.042,60.642 ; 40.043,60.642 40.043,60.642 ; 40.043,60.642 40.978,58.716 ; 40.979,58.715 ccw(c40.933,58.694) 40.978,58.716 ; 40.979,58.715 cw(c40.933,58.694) 40.979,58.713 ; 40.979,58.715 40.978,58.716 ; 40.978,58.716 cw(c40.933,58.694) 40.979,58.713 ; 40.978,58.716 40.978,58.716 ; 40.979,58.713 41.822,56.745 ; 41.823,56.742 ccw(c41.777,56.725) 41.823,56.745 ; 41.823,56.742 ccw(c41.777,56.725) 41.823,56.742 ; 41.823,56.742 ccw(c41.777,56.725) 41.823,56.745 ; 41.823,56.742 41.823,56.742 ; 41.823,56.742 41.823,56.742 ; 41.823,56.742 42.572,54.736 ; 42.573,54.733 ccw(c42.525,54.718) 42.572,54.736 ; 42.573,54.733 ccw(c42.525,54.718) 42.572,54.735 ; 42.572,54.735 ccw(c42.525,54.718) 42.572,54.736 ; 42.572,54.736 42.572,54.736 ; 42.572,54.736 42.572,54.735

## Silkscreen, mask and mechanical layers (free items; w line width, h text height)
Mechanical 1:
  drawing of 311 lines, arcs and shapes, not listed